# Altium PCB EtherWizRiscPC7K.PcbDoc
Units mm, origin at the board's own origin, x right, y up, seen from the top; angles counter-clockwise.
Board outline 75 x 57.5 mm, 4 copper layers (Top Layer, Layer 1, GND, Bottom Layer), stack 2.061 mm thick; 66 components, 73 nets, 414 pads, 74 vias.
Unrouted connection lines stored in the file: 1.
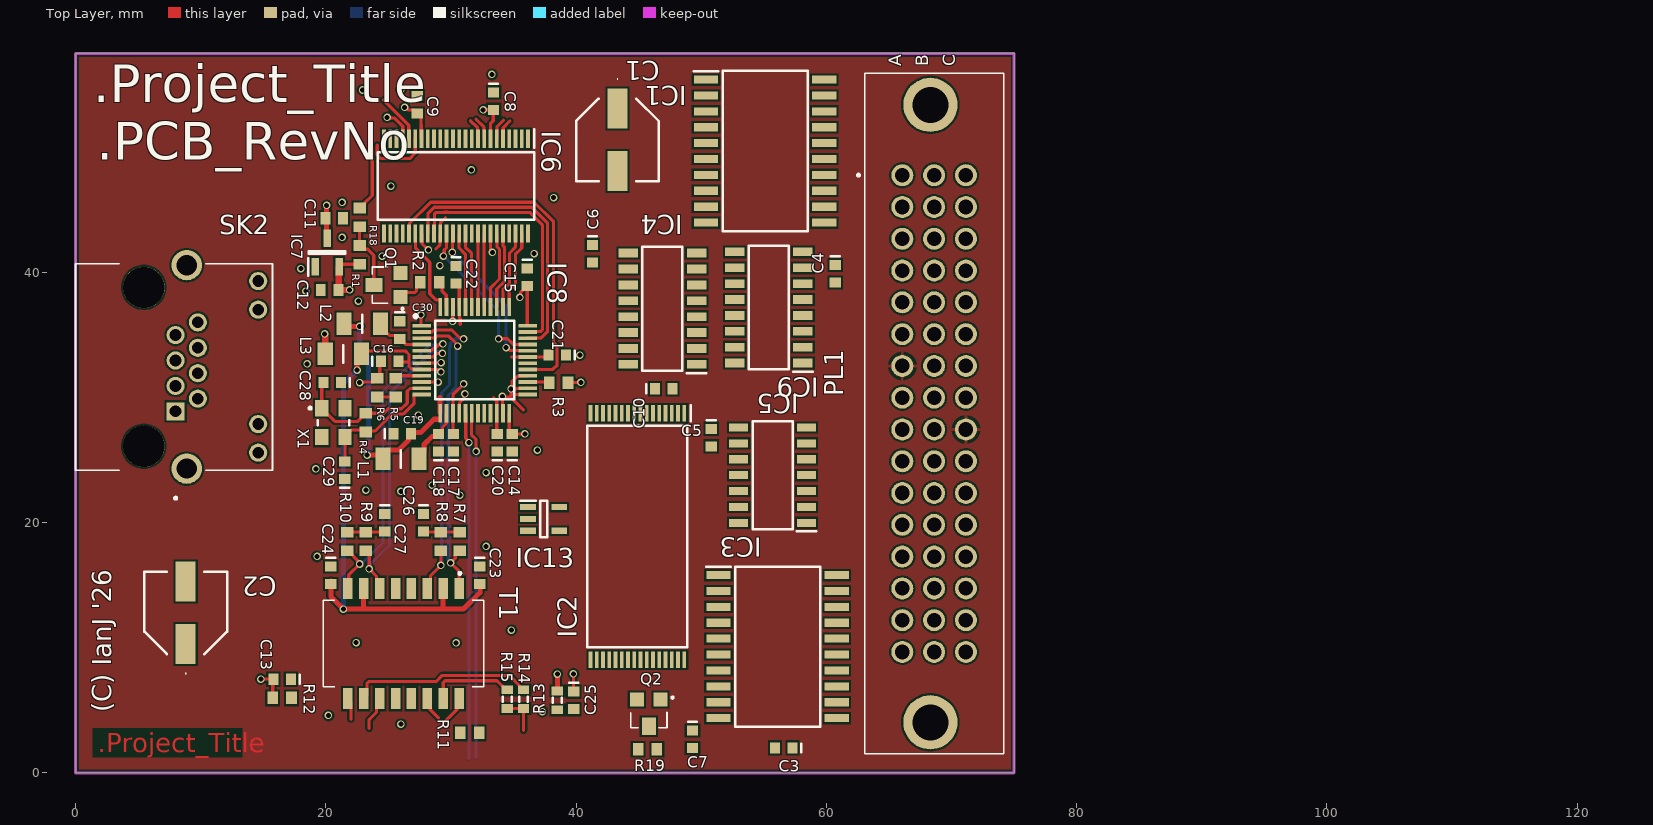
[diagram p0: Top Layer view]
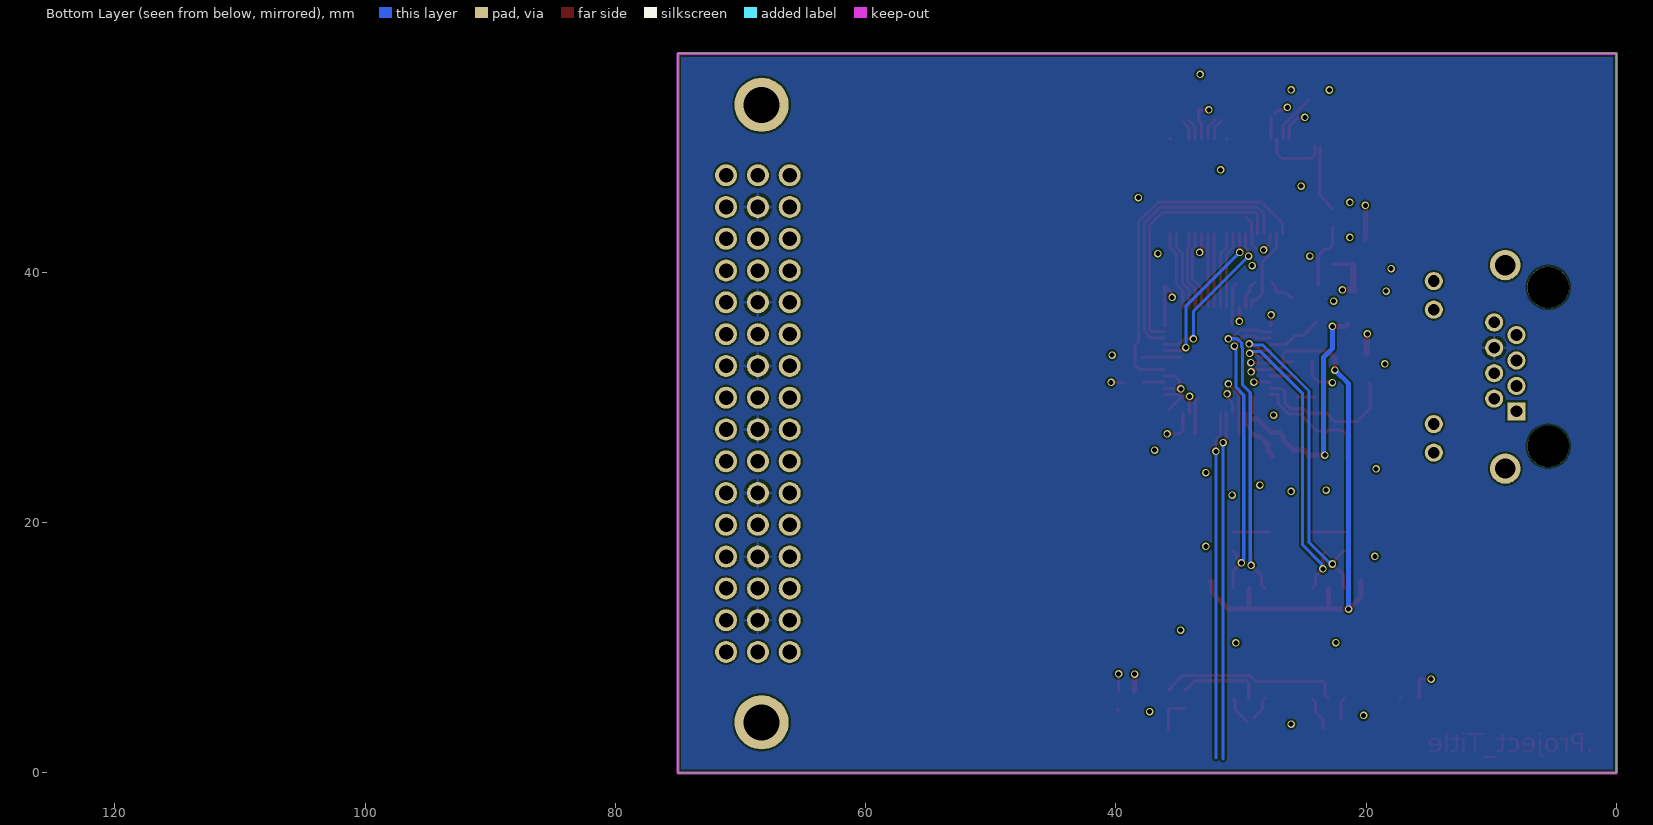
[diagram p1: Bottom Layer view, seen from below]
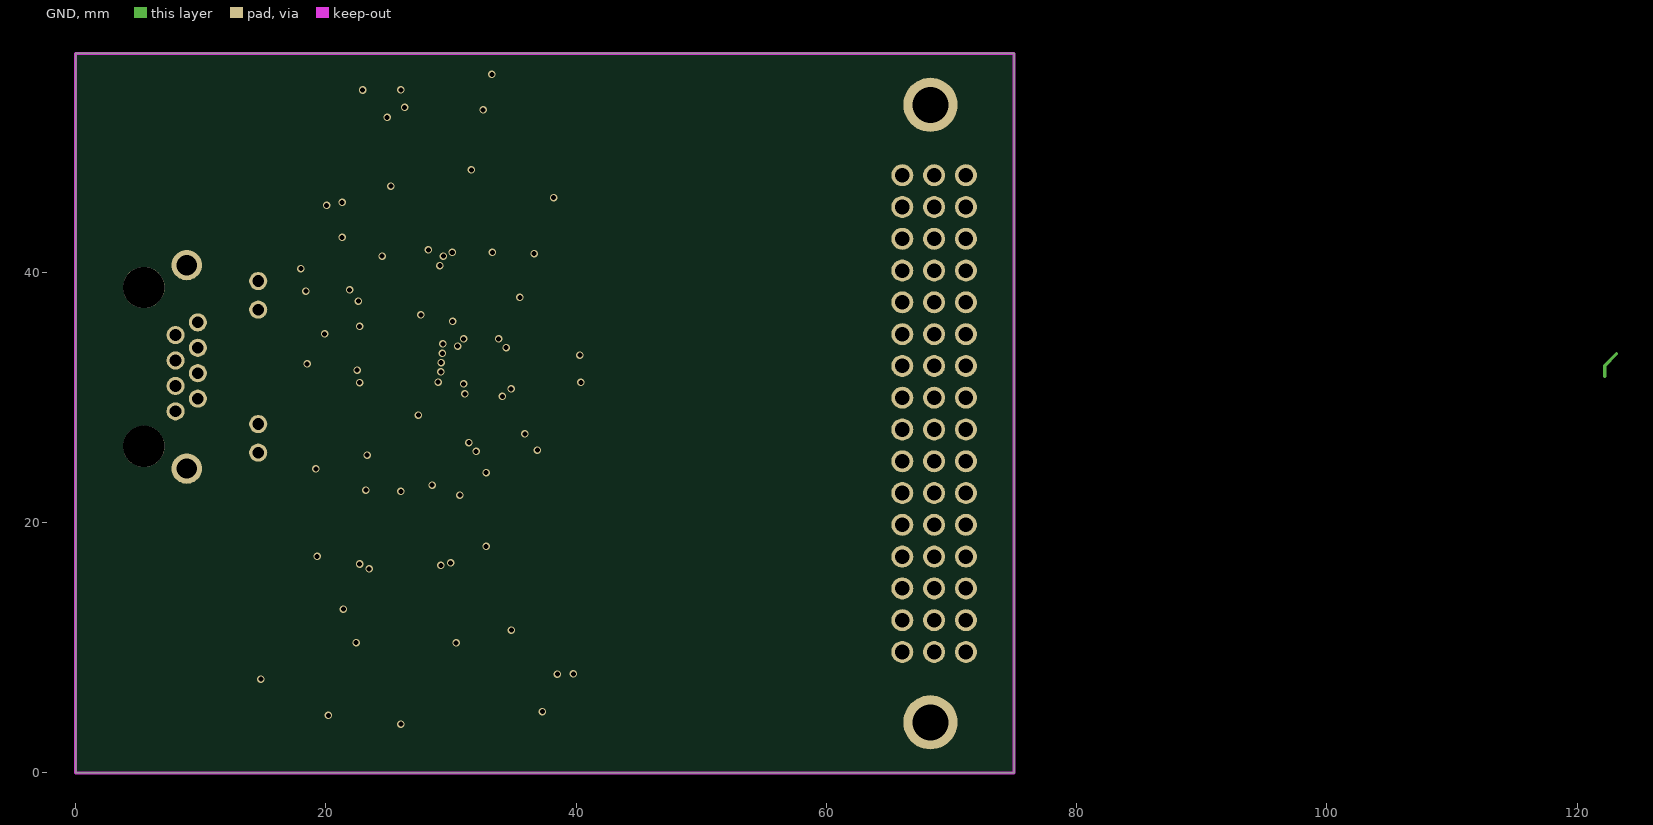
[diagram p2: GND]

## Layer stack, top to bottom
Top Solder: solder mask 0.0102, Solder Resist, Dk 3.5
Top Layer: signal copper 0.0356
Dielectric 1: dielectric 0.2, FR-4, Dk 4.8
Layer 1: signal copper 0.035
Dielectric 2: core 1.2, PP-006, Dk 4.1
Dielectric2: dielectric 0.2, FR-4, Dk 4.8
GND: signal copper 0.035
Dielectric4: dielectric 0.32, FR-4, Dk 4.8
Bottom Layer: signal copper 0.0356
Bottom Solder: solder mask 0.0102, Solder Resist, Dk 3.5

## Board outline
0,0 0,57.5 75,57.5 75,0

## Design rules (kind name [scope] priority, off if disabled: settings)
Clearance [All] p1: gap=0.15 ignorepadtopadclearanceinfootprint=FALSE
HoleSize [All] p1: absolutevalues=TRUE maxlimit=5 minlimit=0.025 maxpercent=80.000 minpercent=20.000
MinimumSolderMaskSliver [All] p1: minsoldermaskwidth=0.1
PolygonConnect [All] p1: connectstyle=Relief reliefconductorwidth=0.254 reliefentries=4 polygonreliefangle="90 Angle" airgapwidth=0.254
RoutingVias [All] p1: holewidth=0.711 width=1.27 viastyle="Through Hole" minholewidth=0.711 minwidth=1.27 maxholewidth=0.711 maxwidth=1.27
SilkToSilkClearance [All] p1 off: silktosilkclearance=0.254
SilkToSolderMaskClearance [IsPad] p1 off: minsilkscreentomaskgap=0.254 clearancetoexposedcopper=TRUE
SolderMaskExpansion [All] p1: expansion=0.102 istentingtop=FALSE
SupplyNets "Schematic Supply Nets_1" [InNet('VCC')] p1: voltage=0.000
SupplyNets "Schematic Supply Nets" [InNet('GND')] p2: voltage=0.000
Width [All] p1: maxlimit=0.5 minlimit=0.254 preferedwidth=0.254 midlayer1_maxwidth=0.254 midlayer2_maxwidth=0.254 minimp=50.000000 maximp=50.000000 favimp=50.000000
26 further rules are at their usual default settings.

## Classes and differential pairs
component class A7000RiscPC_Joystick: PL1

## Components (designator, comment, footprint, x,y, rotation, side; value= is the part's Value field where it differs from the comment)
C1 "EEE-HA1C470AP" EEE1AA101SP 43.3,50.6 r270 top
C2 "EEE-HA1C470AP" EEE1AA101SP 8.8,12.8 r90 top
C3 "100n" CAPC1608L 56.6,2 r180 top
C4 "100n" CAPC1608L 60.7,39.9 r270 top
C5 "100n" CAPC1608L 50.8,26.8 r270 top
C6 "100n" CAPC1608L 41.3,41.5 r270 top
C7 "100n" CAPC1608L 49.3,2.7 r270 top
C8 "100n" CAPC1608L 33.4,53.7 r270 top
C9 "100n" CAPC1608L 27.3,53.4 r270 top
C10 "100n" CAPC1608L 47,30.7 r0 top
C11 "1uF" CAPC1608X90N 20.67,44.328 r180 top
C12 "1uF" CAPC1608X90N 20.3,38.6 r0 top
C13 "100n" CAPC1608L 16.5,7.5 r180 top
C14 "100n" CAPC1608L 34.9,26.4 r90 top
C15 "100n" CAPC1608L 36.1,39.6 r270 top
C16 "100n" CAPC1608L 25.1,32.9 r0 top
C17 "100n" CAPC1608L 30.2,26.4 r90 top
C18 "100nF" CAPC1608L 29,26.4 r90 top
C19 "100nF" CAPC1608L 26.1,27.1 r0 top
C20 "100nF" CAPC1608L 33.7,26.4 r90 top
C21 "100nF" CAPC1608L 38.5,33.4 r180 top
C22 "100nF" CAPC1608L 30.4,39.8 r270 top
C23 "100nF" CAPC1608L 32.3,15.8 r270 top
C24 "100nF" CAPC1608L 20.4,15.8 r270 top
C25 "1nF" CAPC1608L 39.8,5.8 r270 top
C26 "100nF" CAPC1608L 27.8,20 r270 top
C27 "100nF" CAPC1608L 24.7,20 r270 top
C28 "24pF" CAPC1608L 20.5,31.2 r180 top
C29 "24pF" CAPC1608L 21.5,24.2 r90 top
C30 "100nF" CAPC1608L 25.9,35.4 r270 top
IC1 "SN74HCT245DWR" SOIC127P1030X265-20N 55.1,49.7 r0 top
IC2 "MX29F040CTI-70G" SOP50P2000X120-32N 44.9,18.9 r270 top
IC3 "SN74HCT273DWR" SOIC127P1030X265-20N 56.1,10.1 r0 top
IC4 "74HCT138D,653" SOIC127P600X175-16N 46.9,37.1 r180 top
IC5 "74HCT32D" SOIC127P600X175-14N 55.7,23.8 r180 top
IC6 "74ALVC164245DGG_11" SOP50P810X120-48N 30.4,46.9 r270 top
IC7 "MCP1703AT-3302E_CB" SOT95P255X145-3N 20.1,41.6 r90 top
IC8 "W6100L" QFP50P900X900X160-48N 31.9,33 r0 top locked
IC9 "CD74HCT238M96" SOIC127P600X175-16N 55.4,37.2 r180 top
IC13 "74HCT1G125GV125" SOT95P275X110-5N 37.4,20.3 r0 top
L1 "782763800" INDC3216X130N 26,25.1 r180 top
L2 "782763800" INDC3216X130N 22.9,35.9 r0 top
L3 "782763800" INDC3216X130N 21.4,33.5 r0 top
PL1 "5650479-5" 56504795 66.07,47.77 r90 top locked
Q1 "BC846" SOT-23 24.9,39 r90 top
Q2 "BC846" SOT-23 45.8,4.8 r180 top
R1 "100K" RESC1608X50N 22.7,41.4 r270 top
R2 "2K2" RESC1608X50N 28.3,39.2 r180 top
R3 "2K2" RESC1608X50N 38.6,31.2 r0 top
R4 "1M" RESC1608X50N 23.2,28 r90 top
R5 "12K" RESC1608X50N 25.6,30.8 r90 top
R6 "300R" RESC1608X50N 24.1,30.8 r270 top
R7 "50R" RESC1608X50N 30.7,18.5 r270 top
R8 "50R" RESC1608X50N 29.2,18.5 r270 top
R9 "50R" RESC1608X50N 23.2,18.5 r270 top
R10 "50R" RESC1608X50N 21.7,18.5 r270 top
R11 "300R" RESC1608X50N 31.5,3.2 r180 top
R12 "300R" RESC1608X50N 16.5,6 r180 top
R13 "0R" RESC1608L 38.5,5.8 r90 top
R14 "75R" RESC1608L 35.8,5.9 r90 top
R15 "75R" RESC1608L 34.5,5.9 r90 top
R18 "2K2" RESC1608X50N 22.7,44.4 r90 top
R19 "100K" RESC1608X50N 45.7,1.9 r0 top
SK2 "RJHSE5480" AMPHENOL_RJHSE5480 5.45,32.455 r270 top locked (schematic designator SK1)
T1 "PT61017PEL" PT61017PEL 26.2,11 r180 top locked
X1 "25MHz" ABM810000MHZ12D2W 20.6,28 r270 top

## Footprints (in the part's own frame and the unit in brackets; to place one, negate y for a bottom-side part, rotate by r counter-clockwise, add the part's x,y. Pads: shape width x height; smd on the part's side, far side on the other; paste and mask are expansions set on the pad)
56504795 [mm]
  round 1.755 hole 1.17: A1(0,0) A2(-2.54,0) A3(-5.08,0) A4(-7.62,0) A5(-10.16,0) A6(-12.7,0) A7(-15.24,0) A8(-17.78,0) A9(-20.32,0) A10(-22.86,0) A11(-25.4,0) A12(-27.94,0) A13(-30.48,0) A14(-33.02,0) A15(-35.56,0) A16(-38.1,0) B1(0,-2.54) B2(-2.54,-2.54) B3(-5.08,-2.54) B4(-7.62,-2.54) B5(-10.16,-2.54) B6(-12.7,-2.54) B7(-15.24,-2.54) B8(-17.78,-2.54) B9(-20.32,-2.54) B10(-22.86,-2.54) B11(-25.4,-2.54) B12(-27.94,-2.54) B13(-30.48,-2.54) B14(-33.02,-2.54) B15(-35.56,-2.54) B16(-38.1,-2.54) C1(0,-5.08) C2(-2.54,-5.08) C3(-5.08,-5.08) C4(-7.62,-5.08) C5(-10.16,-5.08) C6(-12.7,-5.08) C7(-15.24,-5.08) C8(-17.78,-5.08) C9(-20.32,-5.08) C10(-22.86,-5.08) C11(-25.4,-5.08) C12(-27.94,-5.08) C13(-30.48,-5.08) C14(-33.02,-5.08) C15(-35.56,-5.08) C16(-38.1,-5.08)
  round 4.335 hole 2.89: MH1(-43.725,-2.24) MH2(5.625,-2.24)
  silkscreen extent -46.23,-8.09 8.13,3.6, body extent -46.17,-8.05 8.07,2.97, height 11.57
ABM810000MHZ12D2W [mm]
  rect 1.3x1.05 smd: 1(-1.15,-0.925) 2(1.15,-0.925) 3(1.15,0.925) 4(-1.15,0.925)
  silkscreen extent -1.25,-1.95 0.2,1.25, body extent -1.6,-1.25 1.6,1.25, height 0.8
AMPHENOL_RJHSE5480 [mm]
  rect 1.448x1.448 / inner round 1.448 / far side rect 1.448x1.448 hole 0.94: 1(3.556,2.54)
  round 1.448 hole 0.94: 2(2.54,4.318) 3(1.524,2.54) 4(0.508,4.318) 5(-0.508,2.54) 6(-1.524,4.318) 7(-2.54,2.54) 8(-3.556,4.318) 9(6.858,9.144) 10(4.572,9.144) 11(-4.572,9.144) 12(-6.858,9.144)
  round 2.43 hole 1.62: S1(-8.13,3.43) S2(8.13,3.43)
  round 3.3 hole 3.3 unplated: ""(-6.35,0) ""(6.35,0)
  silkscreen extent -8.26,-5.46 10.6,10.29, body extent -9.93,-5.49 9.78,10.41, height 15.19
CAPC1608L [mm] "Chip Capacitor, Body 1.6x0.8mm, IPC High Density"
  rect 0.8x0.9 smd: 1(-0.7,0) 2(0.7,0)
  silkscreen extent -1.4,-0.35 -1.4,0.35, body extent -0.87,-0.48 0.87,0.48, height 0.85
CAPC1608X90N [mm]
  rect 0.78x0.99 smd: 1(-0.7,0) 2(0.7,0)
  body extent -0.8,-0.41 0.8,0.41, height 0.9
EEE1AA101SP [mm]
  rect 3.2x1.6 smd: 1(-2.5,0) 2(2.5,0)
  silkscreen extent -4.88,-3.3 3.3,3.3, body extent 0,0 0,0
INDC3216X130N [mm]
  rect 1.2x1.8 smd: 1(-1.45,0) 2(1.45,0)
  silkscreen extent 0,-0.7 0,0.7, body extent -1.6,-0.8 1.6,0.8, height 1.3
PT61017PEL [mm]
  rect 0.76x1.7 smd: 1(-4.445,-3.75) 2(-3.175,-3.75) 3(-1.905,-3.75) 4(-0.635,-3.75) 5(0.635,-3.75) 6(1.905,-3.75) 7(3.175,-3.75) 8(4.445,-3.75) 9(4.445,5.05) 10(3.175,5.05) 11(1.905,5.05) 12(0.635,5.05) 13(-0.635,5.05) 14(-1.905,5.05) 15(-3.175,5.05) 16(-4.445,5.05)
  silkscreen extent -6.4,-5.05 6.4,4.1, body extent -6.33,-3.8 6.45,5.1, height 5.14
QFP50P900X900X160-48N [mm]
  rect 1.475x0.3 smd: 1(-4.238,2.75) 2(-4.238,2.25) 3(-4.238,1.75) 4(-4.238,1.25) 5(-4.238,0.75) 6(-4.238,0.25) 7(-4.238,-0.25) 8(-4.238,-0.75) 9(-4.238,-1.25) 10(-4.238,-1.75) 11(-4.238,-2.25) 12(-4.238,-2.75) 25(4.238,-2.75) 26(4.238,-2.25) 27(4.238,-1.75) 28(4.238,-1.25) 29(4.238,-0.75) 30(4.238,-0.25) 31(4.238,0.25) 32(4.238,0.75) 33(4.238,1.25) 34(4.238,1.75) 35(4.238,2.25) 36(4.238,2.75)
  rect 0.3x1.475 smd: 13(-2.75,-4.238) 14(-2.25,-4.238) 15(-1.75,-4.238) 16(-1.25,-4.238) 17(-0.75,-4.238) 18(-0.25,-4.238) 19(0.25,-4.238) 20(0.75,-4.238) 21(1.25,-4.238) 22(1.75,-4.238) 23(2.25,-4.238) 24(2.75,-4.238) 37(2.75,4.238) 38(2.25,4.238) 39(1.75,4.238) 40(1.25,4.238) 41(0.75,4.238) 42(0.25,4.238) 43(-0.25,4.238) 44(-0.75,4.238) 45(-1.25,4.238) 46(-1.75,4.238) 47(-2.25,4.238) 48(-2.75,4.238)
  silkscreen extent -4.85,-3.15 3.15,3.62, body extent -4.5,-4.5 4.5,4.5, height 1.6
RESC1608L [mm] "Chip Resistor, Body 1.6x0.8mm, IPC High Density"
  rect 0.7x0.9 smd: 1(-0.75,0) 2(0.75,0)
  silkscreen extent -0.2,-0.35 0.2,0.35, body extent -0.8,-0.41 0.8,0.41, height 0.45
RESC1608X50N [mm]
  rect 0.85x1 smd: 1(-0.75,0) 2(0.75,0)
  body extent -0.5,-0.25 0.5,0.25, height 0.35
SOIC127P600X175-14N [mm]
  rect 1.525x0.65 smd: 1(-2.712,3.81) 2(-2.712,2.54) 3(-2.712,1.27) 4(-2.712,0) 5(-2.712,-1.27) 6(-2.712,-2.54) 7(-2.712,-3.81) 8(2.712,-3.81) 9(2.712,-2.54) 10(2.712,-1.27) 11(2.712,0) 12(2.712,1.27) 13(2.712,2.54) 14(2.712,3.81)
  silkscreen extent -3.47,-4.33 1.6,4.48, body extent -3,-4.33 3,4.33, height 1.75
SOIC127P600X175-16N [mm]
  rect 1.55x0.7 smd: 1(-2.725,4.445) 2(-2.725,3.175) 3(-2.725,1.905) 4(-2.725,0.635) 5(-2.725,-0.635) 6(-2.725,-1.905) 7(-2.725,-3.175) 8(-2.725,-4.445) 9(2.725,-4.445) 10(2.725,-3.175) 11(2.725,-1.905) 12(2.725,-0.635) 13(2.725,0.635) 14(2.725,1.905) 15(2.725,3.175) 16(2.725,4.445)
  silkscreen extent -3.5,-4.95 1.6,5.15, body extent -3,-4.95 3,4.95, height 1.75
SOIC127P1030X265-20N [mm]
  rect 1.95x0.65 smd: 1(-4.725,5.715) 2(-4.725,4.445) 3(-4.725,3.175) 4(-4.725,1.905) 5(-4.725,0.635) 6(-4.725,-0.635) 7(-4.725,-1.905) 8(-4.725,-3.175) 9(-4.725,-4.445) 10(-4.725,-5.715) 11(4.725,-5.715) 12(4.725,-4.445) 13(4.725,-3.175) 14(4.725,-1.905) 15(4.725,-0.635) 16(4.725,0.635) 17(4.725,1.905) 18(4.725,3.175) 19(4.725,4.445) 20(4.725,5.715)
  silkscreen extent -5.7,-6.4 3.4,6.4, body extent -5.16,-6.4 5.16,6.4, height 1.75
SOP50P810X120-48N [mm]
  rect 1.475x0.3 smd: 1(-3.788,5.75) 2(-3.788,5.25) 3(-3.788,4.75) 4(-3.788,4.25) 5(-3.788,3.75) 6(-3.788,3.25) 7(-3.788,2.75) 8(-3.788,2.25) 9(-3.788,1.75) 10(-3.788,1.25) 11(-3.788,0.75) 12(-3.788,0.25) 13(-3.788,-0.25) 14(-3.788,-0.75) 15(-3.788,-1.25) 16(-3.788,-1.75) 17(-3.788,-2.25) 18(-3.788,-2.75) 19(-3.788,-3.25) 20(-3.788,-3.75) 21(-3.788,-4.25) 22(-3.788,-4.75) 23(-3.788,-5.25) 24(-3.788,-5.75) 25(3.788,-5.75) 26(3.788,-5.25) 27(3.788,-4.75) 28(3.788,-4.25) 29(3.788,-3.75) 30(3.788,-3.25) 31(3.788,-2.75) 32(3.788,-2.25) 33(3.788,-1.75) 34(3.788,-1.25) 35(3.788,-0.75) 36(3.788,-0.25) 37(3.788,0.25) 38(3.788,0.75) 39(3.788,1.25) 40(3.788,1.75) 41(3.788,2.25) 42(3.788,2.75) 43(3.788,3.25) 44(3.788,3.75) 45(3.788,4.25) 46(3.788,4.75) 47(3.788,5.25) 48(3.788,5.75)
  silkscreen extent -4.52,-6.25 2.7,6.25, body extent -4.06,-6.25 4.06,6.25, height 1
SOP50P2000X120-32N [mm]
  rect 1.3x0.3 smd: 1(-9.85,3.75) 2(-9.85,3.25) 3(-9.85,2.75) 4(-9.85,2.25) 5(-9.85,1.75) 6(-9.85,1.25) 7(-9.85,0.75) 8(-9.85,0.25) 9(-9.85,-0.25) 10(-9.85,-0.75) 11(-9.85,-1.25) 12(-9.85,-1.75) 13(-9.85,-2.25) 14(-9.85,-2.75) 15(-9.85,-3.25) 16(-9.85,-3.75) 17(9.85,-3.75) 18(9.85,-3.25) 19(9.85,-2.75) 20(9.85,-2.25) 21(9.85,-1.75) 22(9.85,-1.25) 23(9.85,-0.75) 24(9.85,-0.25) 25(9.85,0.25) 26(9.85,0.75) 27(9.85,1.25) 28(9.85,1.75) 29(9.85,2.25) 30(9.85,2.75) 31(9.85,3.25) 32(9.85,3.75)
  silkscreen extent -10.5,-4 8.85,4.25, body extent -10,-4 10,4, height 1.2
SOT95P255X145-3N [mm]
  rect 1.4x0.6 smd: 1(-1.15,0.95) 2(-1.15,-0.95) 3(1.15,0)
  silkscreen extent -1.85,-1.45 0.1,1.5, body extent -1.28,-1.45 1.28,1.45, height 1.45
SOT95P275X110-5N [mm]
  rect 1.25x0.5 smd: 1(-1.25,0.95) 2(-1.25,0) 3(-1.25,-0.95) 4(1.25,-0.95) 5(1.25,0.95)
  silkscreen extent -1.88,-1.45 0.28,1.45, body extent -1.38,-1.45 1.38,1.45, height 1.1
SOT-23 [mil]
  rect 44x44 smd: 1(-37.5,-42) 2(37.5,-42)
  rect 44x54 smd: 3(-0.25,42)
  silkscreen extent -79,-52 57,47, body extent -57,-47 57,47, height 40

## Part data
C1 C2: "Capacitor Polarised", Manufacturer_Name=Panasonic, Mouser Part Number=667-EEE-HA1C470AP, Arrow Part Number=EEE-HA1C470AP, Arrow Price/Stock=https://www.arrow.com/en/products/eeeha1c470ap/panasonic?utm_currency=USD&region=europe, Datasheet Link=http://industrial.panasonic.com/cdbs/www-data/pdf/RDE0000/ABA0000C1148.pdf, Height=7.8mm, Manufacturer_Part_Number=EEE-HA1C470AP, Mouser Price/Stock=https://www.mouser.co.uk/ProductDetail/Panasonic/EEE-HA1C470AP?qs=d1CqaRUMZD%2FL5qU1hDRerg%3D%3D
C3 C4 C5 C6 C7 C8 C9 C10 C13 C14 C15 C16 C17: library part CAP_100n_0603_50V_0, "CAP 100nF, 0603, 50V, X7R, 10%", Distributor1 Part No=CL10B104KB8NNNC, Distributor2 Part No=311-1344-2-ND, Manufacturer1=Samsung, Manufacturer2=Yageo, Voltage=50V, ComponentLink1Description=ComponentLinknURL1, ComponentLink1URL=https://media.digikey.com/pdf/Data%20Sheets/Samsung%20PDFs/CL_Series_MLCC_ds.pdf, ComponentLink2Description=ComponentLinknURL2, ComponentLink2URL=https://www.yageo.com/upload/media/product/productsearch/datasheet/mlcc/UPY-GPHC_X7R_6.3V-to-50V_18.pdf, Distributor1=Anglia, Distributor2=Digikey, ManuPart1=CL10B104KB8NNNC, ManuPart2=CC0603KRX7R9BB104
C11 C12: library part CL10A105KP8NNNC, "Capacitor", Manufacturer_Name=SAMSUNG, Mouser Part Number=187-CL10A105KP8NNNC, Arrow Part Number=CL10A105KP8NNNC, Arrow Price/Stock=https://www.arrow.com/en/products/cl10a105kp8nnnc/samsung-electro-mechanics?utm_currency=USD&region=nac, Datasheet Link=https://datasheet.lcsc.com/szlcsc/Samsung-Electro-Mechanics-CL10A105KP8NNNC_C26413.pdf, Height=0.9mm, Manufacturer_Part_Number=CL10A105KP8NNNC, Mouser Price/Stock=https://www.mouser.co.uk/ProductDetail/Samsung-Electro-Mechanics/CL10A105KP8NNNC?qs=349EhDEZ59qtu6tL%2F73n2A%3D%3D
C18 C19 C20 C21 C22 C30: library part 100nF0805, "Capacitor", Arrow Part Number=C2012X7R1H104K125AM, LCSC Part #=C111492, Manufacturer_Name=TDK, Mouser Part Number=810-C2012X7R1H104KT5, Arrow Price/Stock=https://www.arrow.com/en/products/c2012x7r1h104k125am/tdk, Datasheet Link=https://product.tdk.com/info/en/catalog/datasheets/mlcc_commercial_midvoltage_en.pdf, Height=1.45mm, Manufacturer_Part_Number=C2012X7R1H104K125AM, Mouser Price/Stock=https://www.mouser.com/Search/Refine.aspx?Keyword=810-C2012X7R1H104KT5
C23 C24 C26 C27: library part 909-0001-L, "Cap ceramic X7R/X5R 100nF 10% 16V C0603", Disti Part Number=432-210, LCSC Part #=C66501, Manufacturer=EPCOS, Tolerance=0.1, Voltage=16V, Component Type=Standard, Construction=X7R, Cost(£)=0.038, Distributer=Farnell, ManuPart=B37931-K9104-K60, Qualified2ndManu=Yageo, Qualified2ndPart=CC0603KRX7R7BB104, RoHS Compliant=YES
C25: library part 910-0053-L, "Cap ceramic X7R 1nF 10% 2kV C1206", Disti Part Number=1206GC102KAT1A, LCSC Part #=C23631, Manufacturer=AVX, Tolerance=0.1, Voltage=2000V, Component Type=Standard, Construction=X7R, Cost(£)=0.187, Distributer=Anglia, ManuPart=1206GC102KAT1A, RoHS Compliant=YES
C28 C29: library part CAP_10P_0603_50V_0, "CAP 10PF, 0603, 50V, NP0, 10%"
IC1: "Integrated Circuit", Manufacturer_Name="Texas Instruments", Mouser Part Number=595-SN74HCT245DWR, Arrow Part Number=SN74HCT245DWR, Arrow Price/Stock=https://www.arrow.com/en/products/sn74hct245dwr/texas-instruments?region=nac, Datasheet Link=https://datasheet.datasheetarchive.com/originals/distributors/SFDatasheet-6/sf-000131457.pdf, Height=2.65mm, Manufacturer_Part_Number=SN74HCT245DWR, Mouser Price/Stock=https://www.mouser.co.uk/ProductDetail/Texas-Instruments/SN74HCT245DWR?qs=st7IWvlL5%2FhHLMwvvkYTgw%3D%3D
IC2: "Integrated Circuit", Manufacturer_Name=Macronix, Arrow Part Number=MX29F040CTI-70G, Arrow Price/Stock=https://www.arrow.com/en/products/mx29f040cti-70g/macronix-international?region=nac, Datasheet Link=https://www.macronix.com/Lists/Datasheet/Attachments/7266/MX29F040C,%205V,%204Mb,%20v2.2.pdf, Height=1.2mm, Manufacturer_Part_Number=MX29F040CTI-70G
IC3: "Integrated Circuit", Manufacturer_Name="Texas Instruments", Mouser Part Number=595-SN74HCT273DWR, Arrow Part Number=SN74HCT273DWR, Arrow Price/Stock=https://www.arrow.com/en/products/sn74hct273dwr/texas-instruments, Datasheet Link=https://datasheet.datasheetarchive.com/originals/distributors/Datasheets-36/DSA-718641.pdf, Height=2.65mm, Manufacturer_Part_Number=SN74HCT273DWR, Mouser Price/Stock=https://www.mouser.co.uk/ProductDetail/Texas-Instruments/SN74HCT273DWR?qs=SL3LIuy2dWww%2FZr6up0MdA%3D%3D
IC4: "Integrated Circuit", Manufacturer_Name=Nexperia, Mouser Part Number=771-74HCT138D-T, Arrow Part Number=74HCT138D,653, Arrow Price/Stock=https://www.arrow.com/en/products/74hct138d653/nexperia?region=nac, Datasheet Link=https://assets.nexperia.com/documents/data-sheet/74HC_HCT138.pdf, Height=1.75mm, Manufacturer_Part_Number=74HCT138D,653, Mouser Price/Stock=https://www.mouser.co.uk/ProductDetail/Nexperia/74HCT138D653?qs=P62ublwmbi8MKahyK7iY6g%3D%3D
IC5: "Integrated Circuit", Manufacturer_Name=Toshiba, Mouser Part Number=N/A, Arrow Part Number=74HCT32D, Arrow Price/Stock=https://www.arrow.com/en/products/74hct32d/toshiba?region=nac, Datasheet Link=https://toshiba.semicon-storage.com/info/docget.jsp?did=37176&prodName=74HCT32D, Height=1.75mm, Manufacturer_Part_Number=74HCT32D, Mouser Price/Stock=https://www.mouser.co.uk/ProductDetail/Toshiba/74HCT32D?qs=j%252B1pi9TdxUZqVZos7uP1Yw%3D%3D
IC6: "Integrated Circuit", Arrow Part Number=74ALVC164245DGG:11, Manufacturer_Name=Nexperia, Mouser Part Number=771-74ALVC164245, Arrow Price/Stock=https://www.arrow.com/en/products/74alvc164245dgg11/nexperia?utm_currency=USD&region=nac, Datasheet Link=https://assets.nexperia.com/documents/data-sheet/74ALVC164245.pdf, Height=1.2mm, Manufacturer_Part_Number=74ALVC164245DGG:11, Mouser Price/Stock=https://www.mouser.co.uk/ProductDetail/Nexperia/74ALVC164245DGG11?qs=odJ8N4Y39o4j0ykFPcnqaQ%3D%3D
IC7: "Integrated Circuit", Arrow Part Number=MCP1703AT-3302E/CB, Manufacturer_Name=Microchip, Mouser Part Number=579-MCP1703AT3302ECB, Arrow Price/Stock=https://www.arrow.com/en/products/mcp1703at-3302ecb/microchip-technology?region=nac, Datasheet Link=http://uk.rs-online.com/web/p/products/7709509, Height=1.45mm, Manufacturer_Part_Number=MCP1703AT-3302E/CB, Mouser Price/Stock=https://www.mouser.co.uk/ProductDetail/Microchip-Technology/MCP1703AT-3302E-CB?qs=PZkJWYMe7leeY97bgTp%252B9w%3D%3D
IC8: "Integrated Circuit", Manufacturer_Name="WIZnet Inc", Mouser Part Number=950-W6100L, Datasheet Link=https://eu.mouser.com/datasheet/2/443/w6100_ds_v104e-1994614.pdf, Height=1.6mm, Manufacturer_Part_Number=W6100L, Mouser Price/Stock=https://www.mouser.co.uk/ProductDetail/WIZnet/W6100L?qs=pUKx8fyJudARLmbJE2EKlA%3D%3D
IC9: "Integrated Circuit", Manufacturer_Name="Texas Instruments", Mouser Part Number=595-CD74HCT238M96, Datasheet Link=http://www.ti.com/lit/gpn/cd74hct238, Height=1.75mm, Manufacturer_Part_Number=CD74HCT238M96, Mouser Price/Stock=https://www.mouser.co.uk/ProductDetail/Texas-Instruments/CD74HCT238M96?qs=xFfolx0DHx1u%2Fks4%2FbIqqQ%3D%3D
IC13: "Integrated Circuit", Manufacturer_Name=Nexperia, Datasheet Link=https://assets.nexperia.com/documents/data-sheet/74HC_HCT1G125.pdf, Height=1.1mm, Manufacturer_Part_Number=74HCT1G125GV125
L1 L2 L3: library part 74279215, "Inductor", Manufacturer_Name="Wurth Elektronik", Mouser Part Number=710-782763800, Datasheet Link=http://componentsearchengine.com/Datasheets/1/74279215.pdf, Height=1.3mm, Manufacturer_Part_Number=782763800, Mouser Price/Stock=https://www.mouser.co.uk/ProductDetail/Wurth-Elektronik/74279215?qs=5twSNpOB8IC%252BebnV0jQtuw%3D%3D
PL1: "Connector", Manufacturer_Name="TE Connectivity", Mouser Part Number=571-5650479-5, Arrow Part Number=5650479-5, Arrow Price/Stock=https://www.arrow.com/en/products/5650479-5/te-connectivity?region=europe, Datasheet Link=https://www.te.com/commerce/DocumentDelivery/DDEController?Action=showdoc&DocId=Customer+Drawing%7F5650479%7FP%7Fpdf%7FEnglish%7FENG_CD_5650479_P.pdf%7F5650479-5, Height=11.61mm, Manufacturer_Part_Number=5650479-5, Mouser Price/Stock=https://www.mouser.co.uk/ProductDetail/TE-Connectivity/5650479-5?qs=xrnNvQC1SKQu%252BZBLSdOcFw%3D%3D
Q1 Q2: library part TRANS_NPN_BC846_0, "Transistor NPN, 65V, 100mA, TO-236AB/SOT23"
R1 R19: library part 920-0030-L, "Resistor 100K 1%  0603"
R2 R3 R18: library part 920-0030-L, "Resistor 2K2 1%  0603", Disti Part Number=2447434, LCSC Part #=C127449, Manufacturer=Multicomp, Power=63mW, Tolerance=0.01, Component Type=Standard, Construction="Thick Film", Cost(£)=0.025, Distributer=Farnell, ManuPart=MCWR06X75R0FTL, RoHS Compliant=YES
R4: library part 920-0030-L, "Resistor 1M 1%  0603", Disti Part Number=2447434, LCSC Part #=C127449, Manufacturer=Multicomp, Power=63mW, Tolerance=0.01, Component Type=Standard, Construction="Thick Film", Cost(£)=0.025, Distributer=Farnell, ManuPart=MCWR06X75R0FTL, RoHS Compliant=YES
R5: library part 920-0030-L, "Resistor 12K 1%  0603", Disti Part Number=2447434, LCSC Part #=C127449, Manufacturer=Multicomp, Power=63mW, Tolerance=0.01, Component Type=Standard, Construction="Thick Film", Cost(£)=0.025, Distributer=Farnell, ManuPart=MCWR06X75R0FTL, RoHS Compliant=YES
R6: library part 920-0030-L, "Resistor 300R 1%  0603", Disti Part Number=2447434, LCSC Part #=C127449, Manufacturer=Multicomp, Power=63mW, Tolerance=0.01, Component Type=Standard, Construction="Thick Film", Cost(£)=0.025, Distributer=Farnell, ManuPart=MCWR06X75R0FTL, RoHS Compliant=YES
R7 R8 R9 R10: library part 920-0030-L, "Resistor 50R 1%  0603", Disti Part Number=2447434, LCSC Part #=C127449, Manufacturer=Multicomp, Power=63mW, Tolerance=0.01, Component Type=Standard, Construction="Thick Film", Cost(£)=0.025, Distributer=Farnell, ManuPart=MCWR06X75R0FTL, RoHS Compliant=YES
R11 R12: library part 920-0030-L, "Resistor 300R 1%  0603"
R13: library part 920-0001-L, "Resistor 0R0 1A Max 0603", Disti Part Number=923-3130, LCSC Part #=C844718, Manufacturer=Vishay, Component Type=Standard, Construction="Thick Film", Cost(£)=0.056, Distributer=Farnell, ManuPart=CRCW06030000Z0EA, Qualified2ndManu=Yageo, Qualified2ndPart=RC0603JR-070RL, RoHS Compliant=YES
R14 R15: library part 920-0030-L, "Resistor 75R 1%  0603", Disti Part Number=2447434, LCSC Part #=C127449, Manufacturer=Multicomp, Power=63mW, Tolerance=0.01, Component Type=Standard, Construction="Thick Film", Cost(£)=0.025, Distributer=Farnell, ManuPart=MCWR06X75R0FTL, RoHS Compliant=YES
SK2: "Ethernet socket - through hole", Disti Part Number=2709018, Manufacturer=Amphenol, Distributer=Farnell, ManuPart=RJHSE-5480
T1: "Transformer", Disti Part Number=652-PT61017PEL, LCSC Part #=C124001, Manufacturer=Bourns, Arrow Price/Stock=https://www.arrow.com/en/products/pt61017pel/bourns?region=europe, Datasheet Link=http://www.bourns.com/docs/Product-Datasheets/pt61017pel.pdf, Distributer=Mouser, Height=5mm, ManuPart=PT61017PEL, Mouser Price/Stock=https://www.mouser.co.uk/ProductDetail/Bourns/PT61017PEL?qs=0rbOLB9uh%252BASY8PB9lbWrQ%3D%3D
X1: library part ABM8-25.000MHZ-D2X-T, "Crystal or Oscillator", Manufacturer_Name=ABRACON, Mouser Part Number=815-ABM825MHZD2XT, Arrow Part Number=ABM8-25.000MHZ-D2X-T, Arrow Price/Stock=https://www.arrow.com/en/products/abm8-25.000mhz-d2x-t/abracon?region=nac, Datasheet Link=https://abracon.com/Resonators/abm8.pdf, Height=0.8mm, Manufacturer_Part_Number=ABM8-25.000MHZ-D2X-T, Mouser Price/Stock=https://www.mouser.co.uk/ProductDetail/ABRACON/ABM8-25.000MHZ-D2X-T?qs=XeJtXLiO41RuPiM7CXbPRQ%3D%3D

## Via types
v1: diameter 0.6, hole 0.4, Top Layer to Bottom Layer, tented both sides, 74 vias

## Nets (pads, with @x,y where several pads share a name; then routed paths per layer and width w, separated by ;. In a path a pad name is that pad's centre, name@x,y a point inside that pad or via, vN(x,y) a via of type N, cw(c..) or ccw(c..) an arc to the next point about the centre after c; other vN are vias at no path point)
BD0: PL1.C14
BD1: PL1.A14
BD2: PL1.A15
BD3: PL1.A16
BD4: PL1.C16
BD5: PL1.C15
BD6: PL1.B14
BD7: PL1.A13
BD8: PL1.B12
BD9: PL1.C12
BD10: PL1.A11
BD11: PL1.C11
BD12: PL1.A10
BD13: PL1.B10
BD14: PL1.C10
BD15: PL1.A9
dJoyAFire: SK2.5
dJoyALeft: 
dJoyARight: 
dJoyBFire: SK2.S1
dJoyBLeft: 
dJoyBRight: 
GND: PL1.B2 PL1.B5 PL1.B7 PL1.B9 PL1.B11 PL1.B13 PL1.B15 SK2.6
Interrupt: PL1.C2
JoyA_B1: 
JoyA_B2: 
JoyAX: 
JoyAY: SK2.8
JoyB_B3: 
JoyB_B4: 
JoyBX: SK2.1 SK2.3
JoyBY: SK2.7
JoyPwr: SK2.S2
LA2: PL1.C6
LA3: PL1.C7
LA4: PL1.A6
LA5: PL1.C5
LA6: PL1.B6
LA7: PL1.A5
LA8: PL1.C4
LA9: PL1.A4
Ncsnet: PL1.C1
nEnDigital: 
NetIC2_7: 
NetIC3_7: 
NetLK1_3: 
NetLK2_3: 
NetLK3_3: 
NetLK4_3: 
Nior: PL1.B1
Niow: PL1.A1
Nromnet: PL1.B16
Out0: 
Out1: 
Out2: 
Out3: 
Out4: 
Out8: 
Out9: 
Out10: 
Out11: 
Out12: 
Psp1: PL1.C13
Psp2: PL1.A12
Psp3: PL1.A8
Psp4: PL1.B8
Psp5: PL1.C8
Psp6: PL1.A3
Psp7: PL1.B3
Psp8: PL1.C3
Ready: PL1.A2
Rst: PL1.B4
VCC: PL1.A7 PL1.C9
pads on no net: C1.1 C1.2 C2.1 C2.2 C3.1 C3.2 C4.1 C4.2 C5.1 C5.2 C6.1 C6.2 C7.1 C7.2 C8.1 C8.2 C9.1 C9.2 C10.1 C10.2 C11.1 C11.2 C12.1 C12.2 C13.1 C13.2 C14.1 C14.2 C15.1 C15.2 C16.1 C16.2 C17.1 C17.2 C18.1 C18.2 C19.1 C19.2 C20.1 C20.2 C21.1 C21.2 C22.1 C22.2 C23.1 C23.2 C24.1 C24.2 C25.1 C25.2 C26.1 C26.2 C27.1 C27.2 C28.1 C28.2 C29.1 C29.2 C30.1 C30.2 IC1.1 IC1.2 IC1.3 IC1.4 IC1.5 IC1.6 IC1.7 IC1.8 IC1.9 IC1.10 IC1.11 IC1.12 IC1.13 IC1.14 IC1.15 IC1.16 IC1.17 IC1.18 IC1.19 IC1.20 IC2.1 IC2.2 IC2.3 IC2.4 IC2.5 IC2.6 IC2.7 IC2.8 IC2.9 IC2.10 IC2.11 IC2.12 IC2.13 IC2.14 IC2.15 IC2.16 IC2.17 IC2.18 IC2.19 IC2.20 IC2.21 IC2.22 IC2.23 IC2.24 IC2.25 IC2.26 IC2.27 IC2.28 IC2.29 IC2.30 IC2.31 IC2.32 IC3.1 IC3.2 IC3.3 IC3.4 IC3.5 IC3.6 IC3.7 IC3.8 IC3.9 IC3.10 IC3.11 IC3.12 IC3.13 IC3.14 IC3.15 IC3.16 IC3.17 IC3.18 IC3.19 IC3.20 IC4.1 IC4.2 IC4.3 IC4.4 IC4.5 IC4.6 IC4.7 IC4.8 IC4.9 IC4.10 IC4.11 IC4.12 IC4.13 IC4.14 IC4.15 IC4.16 IC5.1 IC5.2 IC5.3 IC5.4 IC5.5 IC5.6 IC5.7 IC5.8 IC5.9 IC5.10 IC5.11 IC5.12 IC5.13 IC5.14 IC6.1 IC6.2 IC6.3 IC6.4 IC6.5 IC6.6 IC6.7 IC6.8 IC6.9 IC6.10 IC6.11 IC6.12 IC6.13 IC6.14 IC6.15 IC6.16 IC6.17 IC6.18 IC6.19 IC6.20 IC6.21 IC6.22 IC6.23 IC6.24 IC6.25 IC6.26 IC6.27 IC6.28 IC6.29 IC6.30 IC6.31 IC6.32 IC6.33 IC6.34 IC6.35 IC6.36 IC6.37 IC6.38 IC6.39 IC6.40 IC6.41 IC6.42 IC6.43 IC6.44 IC6.45 IC6.46 IC6.47 IC6.48 IC7.1 IC7.2 IC7.3 IC8.1 IC8.2 IC8.3 IC8.4 IC8.5 IC8.6 IC8.7 IC8.8 IC8.9 IC8.10 IC8.11 IC8.12 IC8.13 IC8.14 IC8.15 IC8.16 IC8.17 IC8.18 IC8.19 IC8.20 IC8.21 IC8.22 IC8.23 IC8.24 IC8.25 IC8.26 IC8.27 IC8.28 IC8.29 IC8.30 IC8.31 IC8.32 IC8.33 IC8.34 IC8.35 IC8.36 IC8.37 IC8.38 IC8.39 IC8.40 IC8.41 IC8.42 IC8.43 IC8.44 IC8.45 IC8.46 IC8.47 IC8.48 IC9.1 IC9.2 IC9.3 IC9.4 IC9.5 IC9.6 IC9.7 IC9.8 IC9.9 IC9.10 IC9.11 IC9.12 IC9.13 IC9.14 IC9.15 IC9.16 IC13.1 IC13.2 IC13.3 IC13.4 IC13.5 L1.1 L1.2 L2.1 L2.2 L3.1 L3.2 PL1.MH1 PL1.MH2 Q1.1 Q1.2 Q1.3 Q2.1 Q2.2 Q2.3 R1.1 R1.2 R2.1 R2.2 R3.1 R3.2 R4.1 R4.2 R5.1 R5.2 R6.1 R6.2 R7.1 R7.2 R8.1 R8.2 R9.1 R9.2 R10.1 R10.2 R11.1 R11.2 R12.1 R12.2 R13.1 R13.2 R14.1 R14.2 R15.1 R15.2 R18.1 R18.2 R19.1 R19.2 SK2. SK2.2 SK2.4 SK2.9 SK2.10 SK2.11 SK2.12 T1.1 T1.2 T1.3 T1.4 T1.5 T1.6 T1.7 T1.8 T1.9 T1.10 T1.11 T1.12 T1.13 T1.14 T1.15 T1.16 X1.1 X1.2 X1.3 X1.4
copper on no net: | length 557.9
  Top Layer w0.254: v1(14.8,7.5) 15.8,7.5 ; 15.75,6 15.75,7.5 ; 17.25,6 17.287,5.963 ; 19.8,31.2 19.675,31.075 19.675,29.15 20.725,28.1 22.55,28.1 22.827,28.377 22.827,28.452 23.125,28.75 24.632,28.75 24.986,29.104 26.046,29.104 26.5,29.558 26.5,30.5 26.727,30.727 27.639,30.727 27.662,30.75 ; 21.1,40.65 22.7,40.65 ; 21.5,24.9 21.525,24.925 21.525,26.975 21.923,27.373 22.045,27.373 22.072,27.4 23.05,27.4 23.2,27.25 23.282,27.332 23.932,27.332 25.3,28.7 26.213,28.7 27.051,29.538 27.051,30.227 27.074,30.25 27.662,30.25 ; 21.7,17.75 21.775,17.75 22.634,16.891 22.634,16.766 v1(22.7,16.7) 21.832,15.832 21.832,14.827 21.755,14.75 ; 21.7,19.25 23,19.25 24.3,19.25 ; 21.755,5.95 22,5.705 22,4.3 ; v1(22.7,31.2) 22.752,31.252 23.802,31.252 24.1,31.55 ; 22.7,43.65 22.7,42.15 22.998,41.852 23.348,41.852 23.833,41.367 23.833,38.994 ; 22.7,45.15 22.775,45.15 23.073,45.448 23.073,45.523 23.7,46.15 23.7,50 23.692,50.008 ; 22.85,33.5 23.081,33.731 26.358,33.731 26.647,33.441 26.647,33.209 26.648,32.85 ; 23.025,5.95 23.278,6.203 23.278,7.151 23.427,7.3 28.8,7.3 29.3,7.8 34.645,7.8 35.55,6.895 35.55,6.8 35.7,6.65 35.8,6.65 ; 23.26,17.621 23.297,17.621 23.466,17.452 v1(23.466,16.307) 24.042,15.731 24.042,15.003 24.295,14.75 ; 23.459,3.559 23.449,3.57 23.449,4.249 24.042,4.842 24.042,5.697 24.295,5.95 ; 24,36.05 24.473,35.577 24.473,35.477 24.823,35.127 24.923,35.127 25.077,34.973 25.649,34.973 26.372,34.25 27.662,34.25 ; 24.05,31.5 24.3,31.75 24.3,32.9 ; 24.096,50.175 24.104,50.167 24.104,49.396 24.4,49.1 26.7,49.1 27.15,49.55 27.15,50.688 ; 24.1,30.05 25.6,30.05 ; 24.6,53.8 26.627,51.773 26.627,50.711 26.65,50.688 ; v1(24.9,52.4) 24.966,52.334 25.495,52.334 26.15,51.679 26.15,50.688 ; 25.6,31.55 25.8,31.75 27.662,31.75 ; 25.8,32.85 26.648,32.85 ; 25.977,37.958 25.977,37.979 26.399,38.4 27.1,38.4 27.252,38.552 27.252,38.902 27.55,39.2 ; v1(26.3,53.2) 26.394,53.2 26.621,52.973 27.027,52.973 27.3,52.7 ; 26.65,43.112 26.673,43.135 26.673,43.914 28.367,45.608 29.094,45.608 29.098,45.612 30.102,45.612 30.106,45.608 36.635,45.608 38.2,44.043 38.2,34.4 38.477,34.123 38.477,32.584 38.143,32.25 36.138,32.25 ; 27.15,43.112 27.173,43.089 27.173,41.927 28.3,40.8 28.3,38.3 28.797,37.803 29.127,37.803 29.15,37.78 29.15,37.238 ; v1(27.6,36.6) 27.6,35.773 27.623,35.75 27.662,35.75 ; 27.6,52.4 27.6,51.8 27.627,51.773 27.627,51.419 27.627,50.711 27.65,50.688 ; 27.65,43.112 27.673,43.089 27.673,42.31 v1(28.183,41.8) ; 27.662,31.25 27.67,31.242 28.958,31.242 v1(28.966,31.234) ; 27.662,32.75 27.685,32.773 29.189,32.773 v1(29.211,32.795) ; 27.662,33.25 27.663,33.251 28.579,33.251 28.858,33.531 29.296,33.531 v1(29.305,33.539) ; 27.662,33.75 27.685,33.773 28.464,33.773 28.672,33.981 28.783,33.981 29.025,34.222 29.276,34.222 v1(29.343,34.288) ; 27.662,34.75 28.718,34.75 28.88,34.912 29.829,34.912 30.319,34.423 30.319,34.419 30.524,34.214 v1(30.524,34.12) ; 27.662,35.25 28.511,35.25 28.673,35.412 30.037,35.412 30.683,34.766 30.934,34.766 v1(31,34.7) ; 27.7,19.3 27.75,19.25 29.2,19.25 30.7,19.25 ; 28.105,5.95 28.295,5.76 28.295,5.105 28.992,4.408 ; 28.105,14.75 28.358,15.003 28.358,15.758 v1(29.2,16.6) 29.2,17.75 ; 28.15,43.112 28.15,44.7 28.654,45.204 29.261,45.204 29.265,45.208 29.935,45.208 29.939,45.204 36.467,45.204 37.704,43.967 37.704,43.409 37.704,35.254 37.223,34.773 36.161,34.773 36.138,34.75 ; 28.65,43.112 28.673,43.135 28.673,44.651 28.822,44.8 29.429,44.8 29.433,44.804 29.767,44.804 29.771,44.8 36.3,44.8 37.3,43.8 37.3,35.422 37.151,35.273 36.161,35.273 36.138,35.25 ; 28.8,41.9 29.127,42.227 29.127,43.089 29.15,43.112 29.173,43.135 29.173,43.999 29.56,44.386 ; 28.9,39.15 28.975,39.15 29.273,38.852 29.273,38.527 29.627,38.173 29.627,37.261 29.65,37.238 ; 29,27.1 29.05,27.1 29.323,27.373 29.323,27.522 29.323,27.623 29.627,27.927 29.627,28.739 29.65,28.762 ; v1(29.197,32.045) 29.103,32.045 28.899,32.25 27.662,32.25 27.639,32.273 26.86,32.273 26.648,32.485 26.648,32.85 ; 29.375,5.95 29.375,7.226 29.524,7.375 33.675,7.375 34.4,6.65 34.5,6.65 ; v1(29.4,41.3) 29.466,41.366 29.466,41.81 29.65,41.993 29.65,43.112 ; 29.5,4.1 30.455,5.055 30.455,5.76 30.645,5.95 ; v1(30.1,41.6) 30.127,41.627 30.127,43.089 30.15,43.112 ; v1(30.138,36.095) 30.144,36.101 30.144,37.232 30.15,37.238 ; 30.2,27.1 30.15,27.15 30.15,28.762 30.15,30.221 31,31.071 v1(31,31.1) ; 30.392,39.1 30.665,38.827 30.665,37.253 ; 30.645,14.75 30.645,16.106 v1(29.969,16.782) 30.34,17.154 30.34,17.452 30.638,17.75 30.7,17.75 ; 30.65,28.762 30.673,28.785 30.673,29.564 31.034,29.925 31.034,30.234 v1(31.1,30.3) ; 30.65,37.238 30.673,37.215 30.673,36.377 30.741,36.309 30.741,35.829 ; 30.65,43.112 30.65,41.95 31.15,41.45 31.15,37.238 ; 31.127,50.711 31.15,50.688 ; 31.15,28.762 31.173,28.739 31.173,26.748 31.427,26.494 v1(31.427,26.4) ; 31.15,43.112 31.15,42.021 31.65,41.521 31.65,37.238 ; 31.554,52.133 32.127,51.56 32.127,50.711 32.15,50.688 ; 31.65,28.762 31.65,27.001 32.004,26.647 v1(32.004,25.7) ; 32,52.258 32.627,51.631 32.627,50.711 32.65,50.688 ; 32.15,37.238 32.15,43.112 ; v1(32.577,53) 33.4,53 ; 32.65,37.238 32.65,43.112 ; 33.15,37.238 33.15,38.75 33.877,39.477 33.877,41.839 33.673,42.043 33.673,43.089 33.65,43.112 ; 33.15,43.112 33.15,41.844 33.3,41.694 v1(33.3,41.6) ; 33.15,50.688 33.15,51.886 33.381,52.117 33.381,52.881 33.45,52.95 ; 33.4,30 33.4,29.984 33.65,29.734 33.65,28.762 33.65,27.15 33.7,27.1 ; 33.65,37.238 33.65,38.679 34.281,39.31 34.281,42.006 34.15,42.137 34.15,43.112 ; 33.65,50.688 33.673,50.711 33.673,51.644 34.196,52.167 ; v1(33.8,34.7) 34.516,34.7 34.966,34.25 36.138,34.25 ; v1(34.1,30.1) v1@34.127,30.073 ; 34.15,28.762 34.127,28.785 v1@34.127,30.073 ; 34.15,37.238 34.15,38.607 34.685,39.142 34.685,41.556 35.15,42.021 35.15,43.112 ; 34.15,50.688 34.173,50.711 34.173,51.573 34.7,52.1 ; v1(34.4,34) 34.494,34 34.744,33.75 36.138,33.75 ; 34.5,5.15 35.8,5.15 35.8,3.4 ; 34.65,28.762 34.65,27.35 34.9,27.1 v1(35.9,27.1) ; 34.65,37.238 34.65,38.536 35.15,39.036 35.15,41.45 35.65,41.95 35.65,43.112 ; 34.85,33.25 36.138,33.25 37.55,33.25 37.6,33.2 37.9,33.2 ; 35.167,30.634 34.866,30.634 v1(34.8,30.7) ; 35.167,30.727 36.115,30.727 36.138,30.75 ; v1(35.5,38) 35.566,38.066 35.566,38.416 36.05,38.9 ; 35.627,50.711 35.65,50.688 ; 35.8,29 34.8,30 ; 36.1,38.9 36.1,35.773 36.123,35.75 36.138,35.75 ; 36.138,30.25 34.8,30.25 ; 36.138,31.25 37.8,31.25 37.85,31.2 ; 36.138,31.75 36.115,31.727 35.336,31.727 34.866,31.257 34.866,30.766 v1(34.8,30.7) ; 39.35,31.2 v1@40.4,31.2 ; 39.8,5.1 39.9,5 ; 39.8,6.5 v1@39.8,7.9 ; v1@34.127,30.073 34.166,30.034 34.766,30.034 34.8,30 ; 34.8,30 34.8,30.25 ; 34.8,30.25 v1(34.8,30.7)
  Top Layer w0.4: 19.989,44.364 20.025,44.4 ; v1(20.062,45.362) 20.062,44.437 20.025,44.4 ; 20.103,42.615 20.035,42.682 20.035,44.39 20.025,44.4 ; 20.4,15.332 20.4,14.1 v1(21.4,13.1) 23.025,13.1 ; 21.45,35.9 21.65,35.7 v1(22.7,35.7) ; v1(22.5,32.2) 22.5,33.15 22.85,33.5 ; 23.025,14.75 23.025,13.1 ; v1(23.3,25.4) 24.55,25.4 ; 24.55,25.216 24.55,25.416 24.95,25.816 25.816,25.816 26.6,26.6 26.6,26.9 26.897,27.197 27.566,27.197 28.637,28.268 29.1,28.268 ; 27.45,25.3 27.849,25.699 27.849,26.249 28.5,26.9 28.8,26.9 29,27.1 ; 29.102,28.81 29.102,30.002 ; 29.375,13.241 29.375,14.75 ; 32.3,15.1 32.5,15.3 ; 32.3,15.3 32.3,14.4 31,13.1 29.628,13.1 29.375,13.1 23.025,13.1 ; 38.5,6.55 v1(38.5,7.9)
  Top Layer w0.5: v1(19.9,35.1) 19.9,35.073 19.95,35.023 19.95,33.5 ; 20.972,38.6 v1(21.9,38.6) ; 21,38.6 21.025,38.625 21.025,40.445 ; 21.05,40.45 21.05,40.6 21.1,40.65
  GND w0.254: 122.2,31.7 122.2,32.558 123.145,33.503
  Bottom Layer w0.254: v1(22.7,16.7) 22.794,16.7 22.951,16.857 22.998,16.857 24.569,18.428 24.569,30.525 28.24,34.196 28.998,34.196 29.025,34.222 29.276,34.222 v1(29.343,34.288) ; v1(23.466,16.307) 23.532,16.373 23.532,16.673 25.077,18.218 25.077,30.314 28.45,33.688 29.063,33.688 29.211,33.539 v1(29.305,33.539) ; v1(29.2,16.6) 29.266,16.666 29.266,30.409 29.882,31.024 29.882,34.009 29.947,34.074 29.947,34.359 30.288,34.7 v1(31,34.7) ; v1(29.4,41.3) 33.8,36.9 v1(33.8,34.7) ; v1(29.969,16.782) 29.969,16.876 29.774,17.07 29.774,30.198 30.39,30.814 30.39,33.799 30.458,33.866 30.458,34.054 v1(30.524,34.12) ; v1(30.1,41.6) 34.4,37.3 v1(34.4,34) ; 31.427,1.127 v1(31.427,26.4) ; 32.004,1.2 v1(32.004,25.7)
  Bottom Layer w0.4: v1(21.4,13.1) 21.4,31.1 v1(22.5,32.2) ; v1(22.7,35.7) 22.7,33.913 23.4,33.213 23.4,25.554 23.3,25.454 v1(23.3,25.4)
  other v1: 26,3.9 20.2,4.6 37.3,4.9 39.785,7.914 30.4,10.4 22.427,10.408 34.827,11.408 19.3,17.3 32.8,18.1 30.7,22.2 26,22.5 23.2,22.6 28.5,23 32.8,24 19.2,24.3 36.9,25.8 27.4,28.6 40.381,31.212 18.5,32.7 40.3,33.4 22.6,37.7 18.4,38.5 18,40.3 29.116,40.536 24.5,41.3 36.636,41.508 21.3,42.8 21.3,45.6 38.209,45.976 25.2,46.9 31.638,48.202 22.936,54.581 26,54.6 33.273,55.827

## Polygon pours and split planes (outlines as drawn)
VCC on Top Layer "NONET_L-01_P-001" (solid, remove dead copper, pour order 0): 0,-6.6 75,-6.6 75,77.4 0,77.4
GND on Bottom Layer "NONET_L-01_P-001" (solid, remove dead copper, pour order 1): 0,-6.6 75.001,-6.854 75,77.4 0,77.4

## Keep-outs
Keep-Out Layer:
  the board outline again, w0.254

## Other copper
Top Layer:
  text ".Project_Title" at 1.754,1.654 h1.52

## Silkscreen, mask and mechanical layers (free items; w line width, h text height)
Top Overlay:
  text "A" at 65.967,56.465 h1 r90
  text "B" at 68.126,56.465 h1 r90
  text "C" at 70.285,56.465 h1 r90
  text ".Project_Title" at 1.4,53.6 h3
  text ".PCB_RevNo" at 1.7,49 h3
  text "(C) IanJ '26" at 2.846,4.854 h1.52 r90
Board Shape:
  the board outline again, w0.254
Mechanical 12:
  lines w0.254: -10.025,32.4 79.325,32.4 ; 60.275,28.7 79.5,28.7 ; 68.6,-8.124 68.6,80.522